# Altium PCB JLC_LED_PCB.PcbDoc (part 1 of 2)
Units mm, origin at the board's own origin, x right, y up, seen from the top; angles counter-clockwise.
Board outline 99.87 x 66.87 mm, 2 copper layers (Top Layer, Bottom Layer); 124 components, 99 nets, 405 pads, 296 vias.
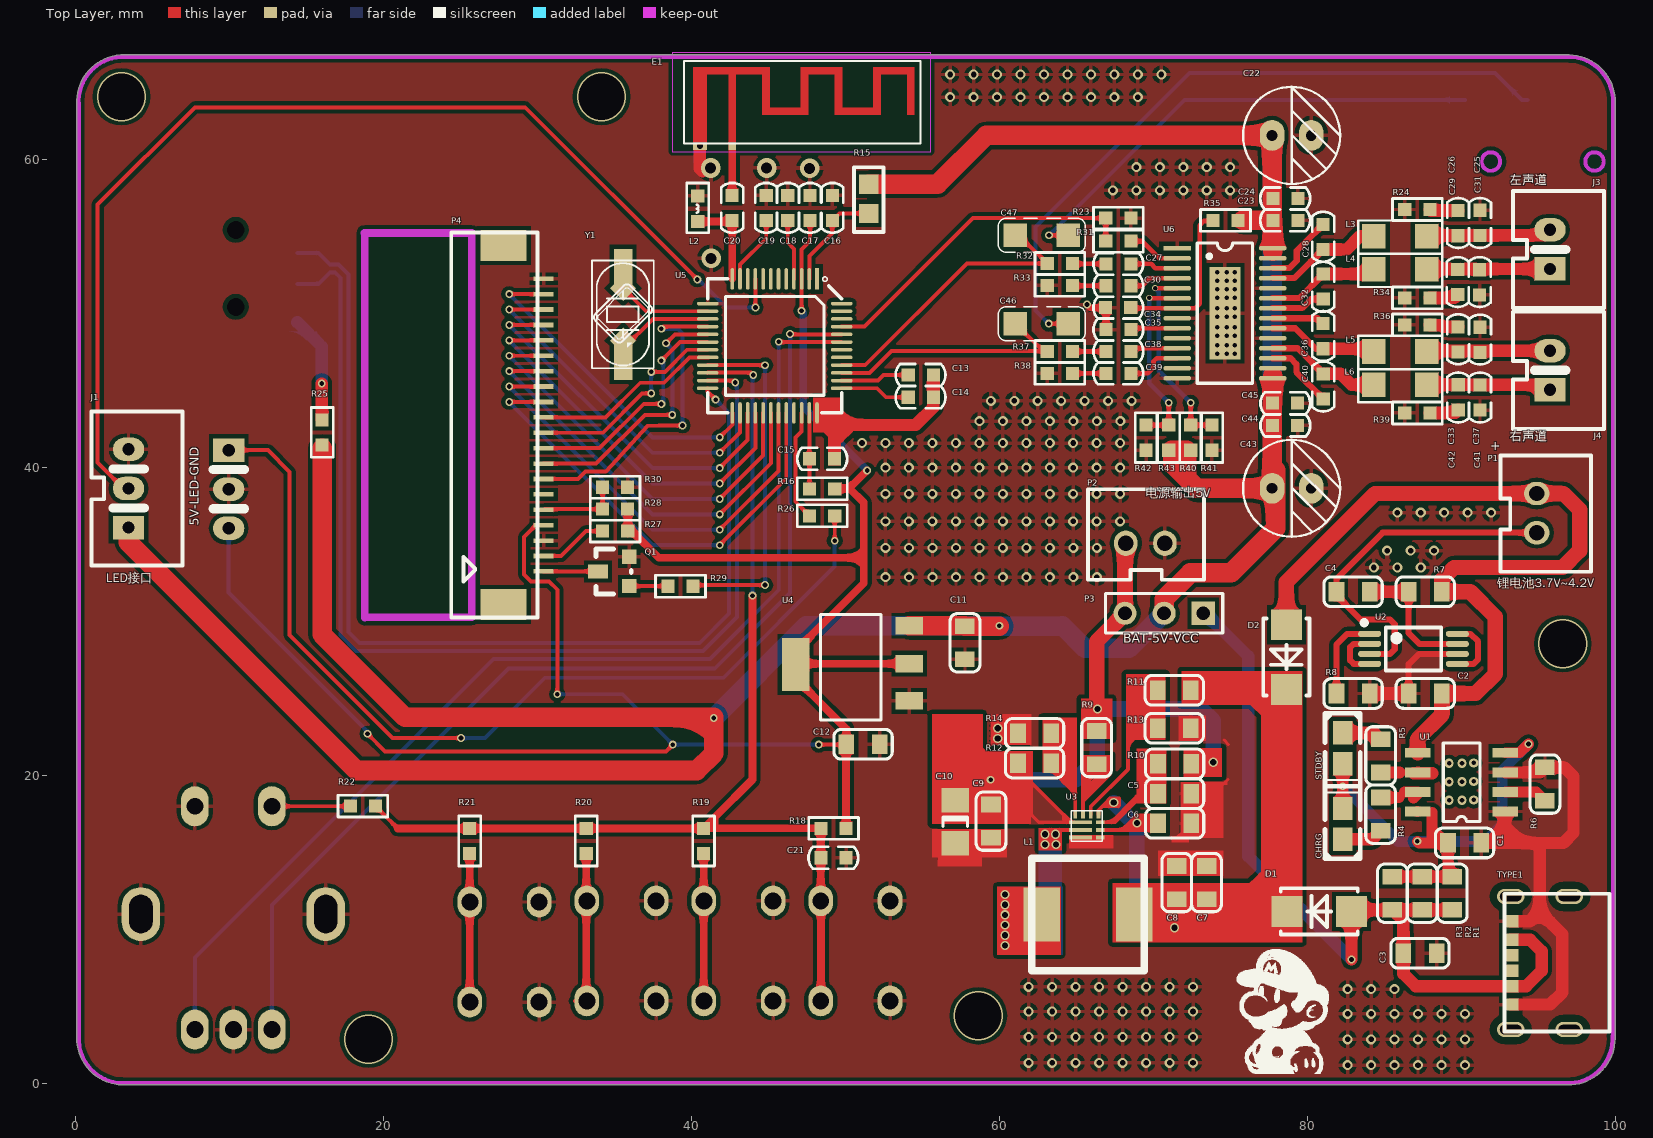
[diagram p0: Top Layer view]
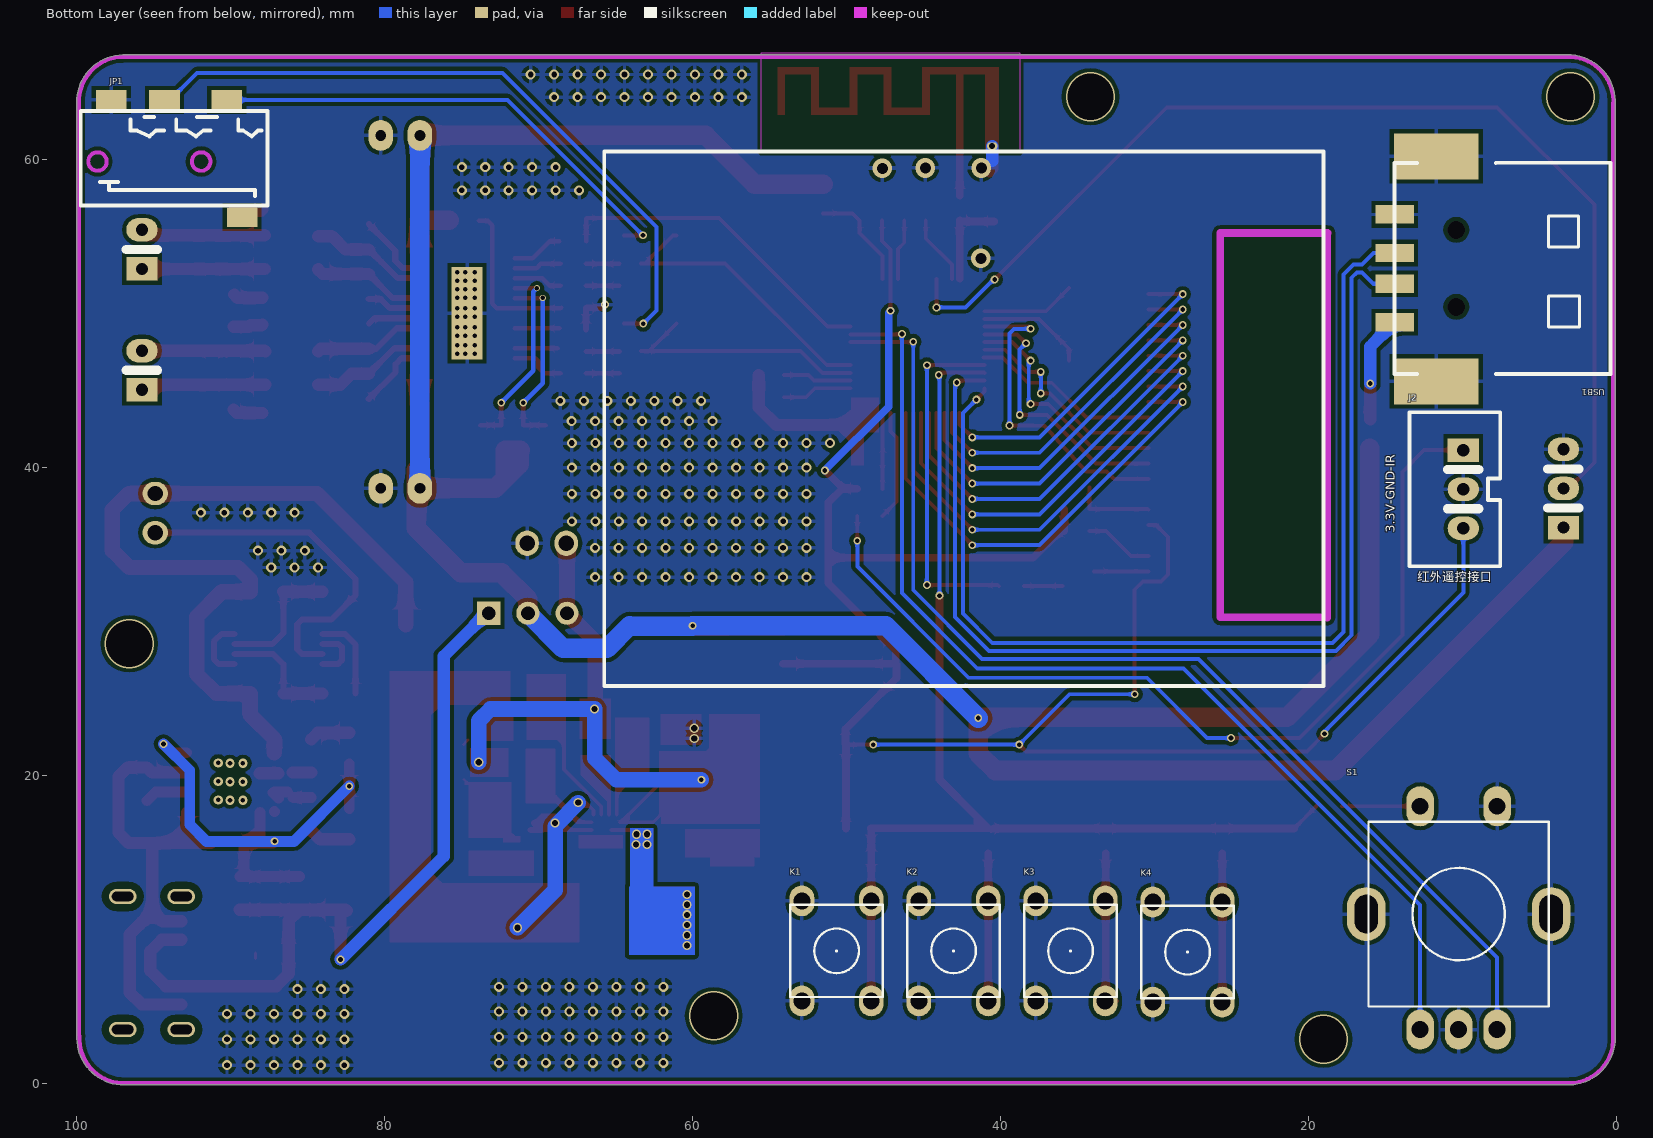
[diagram p1: Bottom Layer view, seen from below]

## Layer stack, top to bottom
Top Solder: solder mask 0.0102, Solder Resist, Dk 3.5
Top Layer: signal copper 0.0356
Dielectric 1: dielectric 0.32, FR-4, Dk 4.8
Bottom Layer: signal copper 0.0356
Bottom Solder: solder mask 0.0102, Solder Resist, Dk 3.5

## Board outline
0.081,2.784 0.081,22.784 cw(c0.208,22.784) 0.081,22.784 0.081,63.598 cw(c3.104,63.779) 2.917,66.802 cw(c3.104,63.779) 2.918,66.802 2.917,66.802 cw(c2.926,66.675) 2.926,66.802 96.698,66.802 cw(c96.698,66.675) 96.718,66.801 cw(c96.737,66.675) 96.729,66.802 cw(c96.915,63.779) 99.938,63.965 cw(c99.811,63.957) 99.938,63.957 99.938,3.143 cw(c96.915,2.962) 99.943,2.962 cw(c96.915,2.962) 97.126,-0.059 cw(c97.104,0.066) 97.104,-0.061 3.286,-0.061 cw(c3.104,2.962) 0.081,2.776 cw(c0.208,2.784)
cut-out: -6.553,-102.159 -6.299,-102.159 -6.299,-101.905 -6.553,-101.905

## Design rules (kind name [scope] priority, off if disabled: settings)
Clearance [All] p1: gap=0.254 ignorepadtopadclearanceinfootprint=TRUE
ComponentClearance [All] p1: gap=0 collisioncheckmode=3 verticalgap=0 showdistances=FALSE
DiffPairsRouting DiffPair_50omuDiffPairsRouting [InDifferentialPair ('USBDX')] p1: maxlimit=0.508 minlimit=0.254 mostfreqgap=0.254 toplayer_minwidth=0.152 toplayer_maxwidth=0.381 toplayer_prefwidth=0.254 bottomlayer_minwidth=0.152 bottomlayer_maxwidth=0.381 bottomlayer_prefwidth=0.254 maxuncoupledlength=12.7
HoleSize [All] p1: absolutevalues=TRUE maxlimit=10 minlimit=0 maxpercent=80.000 minpercent=20.000
HoleToHoleClearance [All] p1: gap=0 allowstackedmicrovias=TRUE
MatchedLengths MatchedLengths_1 [InDifferentialPair ('USBDX')] p1: tolerance=25.4 checknetsindiffpair=FALSE checkdiffpairvsdiffpair=TRUE checkxsignals=TRUE checkothers=TRUE
MatchedLengths DiffPair_50omuMatchedLengths [InDifferentialPair ('USBDX')] p2: tolerance=0.254 checknetsindiffpair=FALSE checkdiffpairvsdiffpair=TRUE checkxsignals=TRUE checkothers=TRUE
MatchedLengths [InDifferentialPair ('USBDX')] p3: tolerance=25.4 checknetsindiffpair=FALSE checkdiffpairvsdiffpair=TRUE checkxsignals=TRUE checkothers=TRUE
MinimumSolderMaskSliver [All] p1: minsoldermaskwidth=0
PolygonConnect [All] p1: connectstyle=Relief reliefconductorwidth=0.254 reliefentries=4 polygonreliefangle="90 Angle" airgapwidth=0.254
RoutingVias [All] p1: holewidth=0.711 width=1.27 viastyle="Through Hole" minholewidth=0.152 minwidth=0.254 maxholewidth=0.711 maxwidth=1.27
SilkToSilkClearance [All] p1: silktosilkclearance=0
SilkToSolderMaskClearance [IsPad] p1: minsilkscreentomaskgap=0 clearancetoexposedcopper=TRUE
SolderMaskExpansion [All] p1: expansion=0.102
Width [All] p1: maxlimit=2.54 minlimit=0.152 preferedwidth=0.254
23 further rules are at their usual default settings.

## Classes and differential pairs
component class LED原理图: C1 C2 C3 C4 C5 C6 C7 C8 C9 C10 C11 C12 CHRG D1 D2 L1 P1 P2 P3 R1 R2 R3 R4 R5 R6 R7 R8 R9 R10 R11 R12 R13 R14 STDBY TYPE1 U1 U2 U3 U4 U?
component class BLE主控原理图: C13 C14 C15 C16 C17 C18 C19 C20 C21 E1 J1 J2 K1 K2 K3 K4 L2 P4 Q1 R15 R16 R18 R19 R20 R21 R22 R25 R26 R27 R28 R29 R30 S1 U5 USB1 Y1
component class 功放原理图: C22 C23 C24 C25 C26 C27 C28 C29 C30 C31 C32 C33 C34 C35 C36 C37 C38 C39 C40 C41 C42 C43 C44 C45 C46 C47 J3 J4 JP1 L3 L4 L5 L6 R23 R24 R31 R32 R33 R34 R35 R36 R37 R38 R39 R40 R41 R42 R43 U6
differential pair USBDX: +USBDX_P -USBDX_N

## Components (designator, comment, footprint, x,y, rotation, side; value= is the part's Value field where it differs from the comment)
C1 "Cap" 0805C 89.091,15.644 r0 top value=106
C2 "Cap" 0805C 88.699,25.347 r180 top value=106
C3 "Cap" 0805C 88.354,8.481 r180 top value=226
C4 "Cap" 0805C 81.852,31.951 r0 top value=106
C5 "Cap" 0805C 72.426,18.848 r180 top value=475
C6 "Cap" 0805C 70.269,16.918 r0 top value=105
C7 "Cap" 0805C 73.419,14.149 r270 top value=226
C8 "Cap" 0805C 71.488,14.149 r270 top value=226
C9 "Cap" 0805C 59.423,18.137 r270 top value=226
C10 "Cap2" C1206#1 57.112,17.019 r270 top value=100uF/10V
C11 "Cap" 0805C 57.734,27.559 r90 top value=105
C12 "Cap" 0805C 52.197,22.048 r180 top value=105
C13 "105" C0603 54.864,46.025 r0 top
C14 "105" C0603 54.864,44.577 r0 top
C15 "105" C0603 48.456,40.589 r180 top
C16 "105" C0603 49.124,56.866 r270 top
C17 "105" C0603 47.676,56.866 r270 top
C18 "105" C0603 46.228,56.866 r270 top
C19 "105" C0603 44.831,56.866 r270 top
C20 "2.7P" C0603 42.621,56.866 r270 top
C21 "NC/100pF" C0603 49.2,14.682 r0 top
C22 "470uF/25V" EC2.5-6.3 78.943,61.57 r0 top
C23 "104" C0603 78.537,56.058 r0 top
C24 "102" C0603 78.537,57.48 r0 top
C25 "102" C0603 91.173,55.902 r90 top
C26 "102" C0603 89.751,55.88 r270 top
C27 "475" C0603 67.704,53.238 r0 top
C28 "224" C0603 80.988,54.991 r270 top
C29 "102" C0603 89.73,52.067 r90 top
C30 "475" C0603 67.704,51.816 r0 top
C31 "102" C0603 91.148,52.045 r270 top
C32 "224" C0603 80.993,51.767 r90 top
C33 "102" C0603 89.756,48.336 r270 top
C34 "106" C0603 67.681,50.394 r180 top
C35 "105" C0603 67.704,48.971 r0 top
C36 "224" C0603 80.988,48.542 r270 top
C37 "102" C0603 91.173,48.311 r270 top
C38 "105" C0603 67.704,47.549 r0 top
C39 "105" C0603 67.704,46.126 r0 top
C40 "224" C0603 80.993,45.286 r90 top
C41 "102" C0603 91.173,44.555 r270 top
C42 "102" C0603 89.761,44.578 r90 top
C43 "470uF/25V" EC2.5-6.3 78.943,38.659 r0 top
C44 "104" C0603 78.522,42.748 r180 top
C45 "102" C0603 78.522,44.196 r180 top
C46 "100uF" C1206#2 64.44,49.357 r180 top
C47 "100uF" C1206#2 64.44,55.093 r180 top
CHRG "RED" LED-0805 82.258,15.879 r90 top
D1 "SS34" LC-SMA(DO-214AC)_S2 80.734,11.199 r0 top
D2 "SS34" LC-SMA(DO-214AC)_S2 78.6,27.713 r90 top
E1 "BT_ANT" 新F天线 42.621,60.884 r0 top
J1 "LED" CON-3X2.54 3.429,38.659 r90 top
J2 "CON3" CON-3X2.54 9.931,38.608 r270 bottom
J3 "LOUT" CON-2X2.54 95.717,52.908 r90 top
J4 "ROUT" CON-2X2.54 95.717,45.06 r90 top
JP1 "4 HEADER" AUX1 89.214,56.27 r270 bottom
K1 "" KEY 50.622,8.636 r270 bottom
K2 "" KEY 43.028,8.636 r270 bottom
K3 "" KEY 35.433,8.636 r270 bottom
K4 "" KEY 27.838,8.558 r270 bottom
L1 "Inductor" 电感SMD 65.72,10.999 r180 top value=1R5
L2 "NC" L0603 40.386,56.818 r270 top
L3 "600R/1MHz" R1206 85.994,55.042 r0 top
L4 "600R/1MHz" R1206 85.994,52.883 r0 top
L5 "600R/1MHz" R1206 85.994,47.549 r0 top
L6 "600R/1MHz" R1206 85.994,45.39 r0 top
P1 "Header 2" XH2.54-2 94.864,38.33 r90 top
P2 "Header 2" XH2.54-2 68.174,35.103 r180 top
P3 "Header 3" HDR1X3 73.203,30.556 r180 top
P4 "串口彩屏" FFC-P20-1MM 29.083,42.774 r90 top
Q1 "S9014" SOT23 34.925,33.325 r90 top
R1 "Res2" 0805R 89.37,11.3 r90 top value=1R
R2 "Res2" 0805R 87.414,11.3 r90 top value=1R
R3 "Res2" 0805R 85.484,11.3 r90 top value=1R
R4 "Res2" 0805R 84.722,16.431 r90 top value=2K
R5 "Res2" 0805R 84.722,22.375 r270 top value=10K
R6 "Res2" 0805R 95.39,20.546 r270 top value=2K
R7 "Res2" 0805R 88.699,31.951 r180 top value=100R
R8 "Res2" 0805R 81.852,25.347 r0 top value=1K
R9 "Res2" 0805R 66.281,20.753 r90 top value=100K
R10 "Res2" 0805R 70.269,20.778 r0 top value=1K
R11 "Res2" 0805R 72.403,25.554 r180 top value=300K
R12 "Res2" 0805R 63.332,20.829 r180 top value=470K
R13 "Res2" 0805R 72.403,23.09 r180 top value=50K
R14 "Res2" 0805R 61.176,22.76 r0 top value="148K4      268K"
R15 "4R7" R0805 51.486,57.455 r270 top
R16 "4R7" R0603 48.463,38.633 r0 top
R18 "22K" R0603 49.2,16.586 r0 top
R19 "3K" R0603 40.767,15.773 r270 top
R20 "6.2K" R0603 33.147,15.773 r270 top
R21 "9.1K" R0603 25.578,15.771 r270 top
R22 "33K" R0603 18.646,18.034 r180 top
R23 "10K" R0603 67.689,56.21 r0 top
R24 "68R" R0603 87.102,56.769 r0 top
R25 "2R7" R0603 16.002,42.291 r90 top
R26 "1K" R0603 48.463,36.881 r0 top
R27 "0R" R0603 35.029,35.89 r180 top
R28 "3K" R0603 35.021,37.313 r0 top
R29 "10K" R0603 39.268,32.309 r180 top
R30 "10K" R0603 35.021,38.735 r0 top
R31 "1K" R0603 67.689,54.712 r0 top
R32 "5.1K" R0603 63.894,53.264 r0 top
R33 "5.1K" R0603 63.894,51.845 r0 top
R34 "68R" R0603 87.102,51.029 r0 top
R35 "10R" R0603 74.653,56.06 r180 top
R36 "68R" R0603 87.102,49.276 r0 top
R37 "5.1K" R0603 63.894,47.549 r0 top
R38 "5.1K" R0603 63.894,46.126 r0 top
R39 "68R" R0603 87.102,43.561 r0 top
R40 "0R/NC" R0603 72.39,41.953 r90 top
R41 "0R" R0603 73.762,41.953 r90 top
R42 "0R/NC" R0603 69.494,41.953 r90 top
R43 "0R" R0603 70.968,41.953 r90 top
S1 "编码器" BMQ+PUSH 10.236,11.024 r180 bottom
STDBY "GREEN" LED-0805 82.258,22.787 r270 top
TYPE1 "TYPE-CF-6P-RAT-L6.8W" TYPE-CF-6P-RAT-L6.8W 96.139,7.849 r90 top
U1 "TC4056A" SOP-8 92.824,17.682 r180 top
U2 "DW03D" LC-TSSOP-8_3x4.4x065P 86.855,28.242 r270 top
U3 "SY7065" QFN2*2-10 65.646,16.74 r0 top
U4 "AMS1117-3.3" SOT-233 54.111,24.868 r180 top
U5 "AC6951C" LQFP48 45.39,47.904 r270 top locked
U6 "HT328" SOP28 74.613,50.038 r0 top
USB1 "USB" USBSMT 10.389,50.444 r90 bottom
Y1 "HS-24M" JZ 35.535,49.962 r0 top locked

## Footprints (in the part's own frame and the unit in brackets; to place one, negate y for a bottom-side part, rotate by r counter-clockwise, add the part's x,y. Pads: shape width x height; smd on the part's side, far side on the other; paste and mask are expansions set on the pad)
0805C [mil]
  rect 40x50 smd: 1(0,0) 2(85,0)
  silkscreen extent -32,-38 117,38, body extent 3,-25 82,25, height 30
0805R [mil]
  rect 40x50 smd: 1(0,0) 2(85,0)
  silkscreen extent -32,-38 117,38, body extent 3,-25 82,25, height 30
AUX1 [mm]
  rect 1.27x2 smd: 1(-7.611,-8.5) 2(-7.611,-5.05) 3(-7.611,-1) 4(0,0)
  Keep-Out Layer circle w0.254: c-3.612,-9.394 r0.6
  Keep-Out Layer circle w0.254: c-3.612,-2.663 r0.6
  silkscreen extent -6.9,-10.48 -0.75,1.65
BMQ+PUSH [mm]
  oval 1.8x2.6 hole 1.1: 1(-2.5,-7.5) 2(0,-7.5) 3(2.5,-7.5) 4(-2.5,7) 5(2.5,7)
  oval 2.5x3.5 hole 1.5 slot 2.5 at 90 deg: 6(-6,0) 7(6,0)
  silkscreen extent -5.85,-6 5.85,6
C0603 [mm]
  rect 0.85x0.85 smd: 1(-0.815,0) 2(0.815,0)
  silkscreen extent -1.63,-0.71 1.61,0.71
C1206#1 [mm] "Chip Capacitor; Body 3.2 x 1.6 mm (LxW typ)"
  rect 1.6x1.8 smd: 1(-1.4,0) 2(1.4,0)
  silkscreen extent -0.3,-0.8 0.3,0.8
C1206#2 [mm]
  rect 1.524x1.524 smd: 1(0,0) 2(3.429,0)
  silkscreen extent -1.11,-1.1 4.54,1.1
CON-2X2.54 [mil]
  rect 60x80 hole 31.5: 1(0,0)
  oval 60x80 hole 31.5: 2(100,0)
  silkscreen extent -100,-138 200,94
CON-3X2.54 [mil]
  rect 60x80 hole 31.5: 1(-100,0)
  oval 60x80 hole 31.5: 2(0,0) 3(100,0)
  silkscreen extent -197,-138 197,94
EC2.5-6.3 [mm]
  oval 1.6x2 hole 0.7: 1(-1.27,0.01) 2(1.27,0.01)
  silkscreen extent -3.15,-3.14 3.15,3.16
FFC-P20-1MM [mm]
  rect 0.3x1.3 smd: 1(-9.5,-1.3) 2(-8.5,-1.3) 3(-7.5,-1.3) 4(-6.5,-1.3) 5(-5.5,-1.3) 6(-4.5,-1.3) 7(-3.5,-1.3) 8(-2.5,-1.3) 9(-1.5,-1.3) 10(-0.5,-1.3) 11(0.5,-1.3) 12(1.5,-1.3) 13(2.5,-1.3) 14(3.5,-1.3) 15(4.5,-1.3) 16(5.5,-1.3) 17(6.5,-1.3) 18(7.5,-1.3) 19(8.5,-1.3) 20(9.5,-1.3)
  rect 2x3 smd: 21(11.651,1.3) 22(-11.651,1.3)
  silkscreen extent -12.5,-0.9 12.5,4.7
HDR1X3 [mm] "Connector; Header; 3 Position"
  rect 1.5x1.5 hole 0.9: 1(0,0)
  round 1.5 hole 0.9: 2(2.54,0) 3(5.08,0)
  silkscreen extent -1.27,-1.27 6.35,1.27
JZ [mm]
  rect 1.2x2.5 smd: 1(0,-3) 2(0,3)
  rect 1.2x1.2 smd rot 45: 1(0,-1.7) 2(0,1.7)
  rect 1.2x1.2 on Top Overlay rot 45: 3(1.7,0) 4(-1.7,0)
  silkscreen extent -2.01,-3.5 1.99,3.5
KEY [mm]
  oval 2x1.6 hole 1.1: 1(-3.25,2.25) 1(3.25,2.25) 2(-3.25,-2.25) 2(3.25,-2.25)
  silkscreen extent -3,-3 3,3
L0603 [mm]
  rect 0.85x0.85 smd: 1(-0.83,0) 2(0.83,0)
  silkscreen extent -1.68,-0.71 1.56,0.71
LC-SMA(DO-214AC)_S2 [mm]
  rect 2x2 smd: 1(2.1,0) 2(-2.1,0)
  silkscreen extent -2.5,-1.5 2.5,1.5
LC-TSSOP-8_3x4.4x065P [mm]
  oval 0.4x1.5 smd mask+0.051: 1(-0.975,-2.85) 2(-0.325,-2.85) 3(0.325,-2.85) 4(0.975,-2.85) 5(0.975,2.85) 6(0.325,2.85) 7(-0.325,2.85) 8(-0.975,2.85)
  silkscreen extent -1.85,-3.35 1.4,1.8
LED-0805 [mil]
  rect 60x50 smd: 1(0,0) 2(78.74,0)
  silkscreen extent -50,-45 136,45
LQFP48 [mm]
  rect 1.4x0.23 smd: 1(-4.357,2.739)
  oval 1.4x0.23 smd: 2(-4.357,2.239) 3(-4.357,1.739) 4(-4.357,1.239) 5(-4.357,0.739) 6(-4.357,0.239) 7(-4.357,-0.261) 8(-4.357,-0.761) 9(-4.357,-1.261) 10(-4.357,-1.761) 11(-4.357,-2.261) 12(-4.357,-2.761) 25(4.343,-2.761) 26(4.343,-2.261) 27(4.343,-1.761) 28(4.343,-1.261) 29(4.343,-0.761) 30(4.343,-0.261) 31(4.343,0.239) 32(4.343,0.739) 33(4.343,1.239) 34(4.343,1.739) 35(4.343,2.239) 36(4.343,2.739)
  oval 0.23x1.4 smd: 13(-2.757,-4.361) 14(-2.257,-4.361) 15(-1.757,-4.361) 16(-1.257,-4.361) 17(-0.757,-4.361) 18(-0.257,-4.361) 19(0.243,-4.361) 20(0.743,-4.361) 21(1.243,-4.361) 22(1.743,-4.361) 23(2.243,-4.361) 24(2.743,-4.361) 37(2.743,4.339) 38(2.243,4.339) 39(1.743,4.339) 40(1.243,4.339) 41(0.743,4.339) 42(0.243,4.339) 43(-0.257,4.339) 44(-0.757,4.339) 45(-1.257,4.339) 46(-1.757,4.339) 47(-2.257,4.339) 48(-2.757,4.339)
  silkscreen extent -4.49,-4.36 4.34,4.34
QFN2*2-10 [mm]
  rect 1.5x0.25 smd: 1(-0.4,0.25) 2(-0.4,-0.25) 3(-0.4,-0.75)
  rect 0.55x0.25 smd mask+0.102: 4(0.875,-0.75)
  rect 0.55x0.25 smd: 5(0.875,-0.25) 6(0.875,0.25)
  rect 0.25x0.5 smd: 7(0.75,0.75) 8(0.25,0.75) 9(-0.25,0.75) 10(-0.75,0.75)
  silkscreen extent -1,-1 1,1, body extent -1.47,-1 1.01,1.01, height 63.5
R0603 [mm]
  rect 0.85x0.85 smd: 1(-0.815,0) 2(0.815,0)
  silkscreen extent -1.62,-0.71 1.62,0.71
R0805 [mm]
  rect 1.25x1.25 smd: 1(-0.96,0.007) 2(0.94,0.007)
  silkscreen extent -2.06,-0.95 2.16,0.96
R1206 [mm]
  rect 1.52x1.6 smd: 1(-1.71,0) 2(1.71,0)
  silkscreen extent -2.73,-1.14 2.74,1.02
SOP28 [mm]
  rect 1.8x0.3 smd: 1(-3.1,4.225)
  oval 1.8x0.3 smd: 2(-3.1,3.575) 3(-3.1,2.925) 4(-3.1,2.275) 5(-3.1,1.625) 6(-3.1,0.975) 7(-3.1,0.325) 8(-3.1,-0.325) 9(-3.1,-0.975) 10(-3.1,-1.625) 11(-3.1,-2.275) 12(-3.1,-2.925) 13(-3.1,-3.575) 14(-3.1,-4.225) 15(3.1,-4.225) 16(3.1,-3.575) 17(3.1,-2.925) 18(3.1,-2.275) 19(3.1,-1.625) 20(3.1,-0.975) 21(3.1,-0.325) 22(3.1,0.325) 23(3.1,0.975) 24(3.1,1.625) 25(3.1,2.275) 26(3.1,2.925) 27(3.1,3.575) 28(3.1,4.225)
  rect 2x6 all layers, no hole: 29(0,0)
  silkscreen extent -1.8,-4.55 1.8,4.56
SOP-8 [mil]
  rect 65x25 smd: 1(0,0) 2(0,-50) 3(0,-100) 4(0,-150) 5(224.41,-150) 6(224.41,-100) 7(224.41,-50) 8(224.41,0)
  silkscreen extent 65,-175 159,25
SOT23 [mil]
  rect 36x36 smd: 1(-39.7,-40) 2(35.3,-40)
  rect 36x50 smd: 3(-2.2,40)
  silkscreen extent -60,-45 55,45
SOT-233 [mil]
  rect 70x45 smd: 1(0,0) 2(0,-95.04) 3(0,-192)
  rect 70x135 smd: 4(290.35,-92.95)
  silkscreen extent 72,-221 227,49
TYPE-CF-6P-RAT-L6.8W [mm]
  oval 1x1.8 hole 1.4 slot 0.6 at 0 deg unplated: 0(-4.32,-0.829) 0(-4.32,2.971) 0(4.32,-0.829) 0(4.32,2.971)
  rect 0.8x1 smd: 1(-2.7,2.971) 2(-1.5,2.971) 3(-0.5,2.971) 4(0.5,2.971) 5(1.5,2.971) 6(2.7,2.971)
  silkscreen extent -4.44,-3.43 4.49,3.37, body extent -4.44,-3.98 4.5,3.92, height 1.61
USBSMT [mm]
  rect 1.2x2.5 smd: 1(-1,4) 2(1.5,4) 3(3.5,4) 4(6,4)
  rect 3x5.5 smd: 5(-4.837,1.3) 6(9.773,1.3)
  round 0 hole 1.15: 7(5,0) 8(0,0)
  silkscreen extent -4.36,-10 9.36,4
XH2.54-2 [mil]
  oval 60x65 hole 39.37: 1(0,0) 2(-100.1,0)
  silkscreen extent -200,-138 97,93, body extent -198,-142 98,94, height 276
新F天线 [mm]
  rect 0.5x0.5 smd mask+0.003: 1(0,0)
  rect 0.5x0.5 on Top Solder mask+0.003: 1(0,0)
  rect 0.9x0.5 smd mask+0.003: 2(-2.1,0)
  oval 0.7x0.5 hole 0.4 mask+0.01: 2(-2.1,0)
  rect 0.9x0.5 on Top Solder: 2(-2.1,0)
  Top Layer region: 9.151,4.65 11.851,4.65 11.851,5.15 9.151,5.15
  Top Layer region: 6.651,2.01 9.651,2.01 9.651,2.51 6.651,2.51
  Top Layer region: 4.451,4.65 7.151,4.65 7.151,5.15 4.451,5.15
  Top Layer region: 4.451,2.01 4.951,2.01 4.951,5.15 4.451,5.15
  Top Layer region: 1.951,2.01 2.451,2.01 2.451,5.15 1.951,5.15
  Top Layer region: -0.247,-0.25 0.253,-0.25 0.253,5.15 -0.247,5.15
  Top Layer region: -2.549,-0.25 -1.65,-0.25 -1.65,5.15 -2.549,5.15
  Top Layer region: -2.549,4.65 2.451,4.65 2.451,5.15 -2.549,5.15
  Top Layer region: 1.951,2.01 4.951,2.01 4.951,2.51 1.951,2.51
  Top Layer region: 6.651,2.01 7.151,2.01 7.151,5.15 6.651,5.15
  Top Layer region: 9.151,2.01 9.651,2.01 9.651,5.15 9.151,5.15
  Top Layer region: 11.351,2.01 11.851,2.01 11.851,5.15 11.351,5.15
  silkscreen extent -3.13,0.18 12.22,5.53
电感SMD [mm]
  rect 2.35x3.5 smd: 1(-3,0) 2(3,0)
  silkscreen extent -3.65,-3.65 3.65,3.65

## Part data
C1 C2 C3 C4 C5 C6 C7 C8 C9 C10 C11 C12: "Capacitor", Publisher="Altium Limited"
  C1 C2 C3 C4 C5 C6 C7 C8 C9 C11 C12: LatestRevisionDate=17-Jul-2002, LatestRevisionNote="Re-released for DXP Platform.", PackageDescription="Radial Cap, Thru-Hole; 2 Leads; 0.3 in Pin Spacing", PackageReference=RAD-0.3, Published=8-Jun-2000
  C10: PackageDescription="Capacitor; 2 Leads", PackageReference=CAPR5-4X5, Published=23-Sep-2002
C13 C14 C15 C16 C17 C18 C19 C20 C21 C23 C24 C25 C26 C27 C28 C29 C30 C31 C32 C33 C34 C35 C36 C37 C38 C39 C40 C41 C42 C44 C45 C46 C47: library part CAP-0603
C22 C43: library part +CAP
CHRG STDBY: library part LED0, "Typical INFRARED GaAs LED", LatestRevisionDate=08-Jul-2005, LatestRevisionNote="Mech Layer 1 removed.", PackageDescription="LED; 2 Leads", PackageReference=LED-0, Published=8-Jun-2000, Publisher="Altium Limited"
D1 D2: library part Diode, "Default Diode", Code_JEDEC=DO-214-AB, LatestRevisionDate=17-Jul-2002, LatestRevisionNote="Re-released for DXP Platform.", PackageDescription="DO-214-AB/SMC; 2 C-Bend Leads; Body 7.9 x 5.9 mm, inc. leads (LxW)", PackageReference=SMC, PackageVersion=Sep-1996, Published=8-Jun-2000, Publisher="Altium Limited"
J1: library part CON3, "Connector"
J2: "Connector"
J3 J4: library part CON2, "Connector"
JP1: "4 Pin Header"
K1 K2 K3 K4: library part Key
L2: library part L
L3 L4 L5 L6 R15 R18 R19 R20 R21 R22 R23 R24 R26 R27 R28 R29 R30 R31 R32 R33 R34 R35 R36 R37 R38 R39 R40 R41 R42 R43: library part RES-0603
P1 P2: "Header, 2-Pin", LatestRevisionDate=17-Jul-2002, LatestRevisionNote="Re-released for DXP Platform.", Publisher="Altium Limited"
P3: "Header, 3-Pin", LatestRevisionDate=17-Jul-2002, LatestRevisionNote="Re-released for DXP Platform.", Publisher="Altium Limited"
P4: library part LCD-20P
Q1: library part NPN
R1 R2 R3 R4 R5 R6 R7 R8 R9 R10 R11 R12 R13 R14: "Resistor", LatestRevisionDate=17-Jul-2002, LatestRevisionNote="Re-released for DXP Platform.", PackageDescription="Axial Device, Thru-Hole; 2 Leads; 0.4 in Pin Spacing", PackageReference=AXIAL-0.4, Published=8-Jun-2000, Publisher="Altium Limited"
R16 R25: library part RES
S1: library part CON7, "Connector"
U6: library part HT368
Y1: library part CRYSTAL
L1: Code_IEC=1005, Code_JEITA=0402, LatestRevisionDate=29-May-2009, LatestRevisionNote="IPC-7351 Footprint Added.", PackageDescription="Chip Inductor", PackageReference=0402-A, Published=8-Jun-2000, Publisher="Altium Limited"

## Free pads (board coordinates)
  rect 2.35x4 on Top Solder: 0(89.98,19.587)
  rect 2.35x4 on Bottom Solder: 1(89.903,19.562)

## Via types
v1: diameter 0.65, hole 0.365, Top Layer to Bottom Layer, tented both sides, 174 vias
v2: diameter 0.508, hole 0.305, Top Layer to Bottom Layer, 51 vias
v3: diameter 0.6, hole 0.3, Top Layer to Bottom Layer, 38 vias
v4: diameter 0.6, hole 0.4, Top Layer to Bottom Layer, 17 vias
v5: diameter 3.2, hole 3, Top Layer to Bottom Layer, 5 vias
v6: diameter 1.27, hole 0.711, Top Layer to Bottom Layer, 4 vias
v7: diameter 0.5, hole 0.3, Top Layer to Bottom Layer, 4 vias
v8: diameter 0.4, hole 0.305, Top Layer to Bottom Layer, 1 vias
v9: diameter 0.4, hole 0.3, Top Layer to Bottom Layer, 1 vias
v10: diameter 0.6/0.6 (per signal layer), hole 0.3, Top Layer to Bottom Layer, 1 vias

## Nets (pads, with @x,y where several pads share a name; then routed paths per layer and width w, separated by ;. In a path a pad name is that pad's centre, name@x,y a point inside that pad or via, vN(x,y) a via of type N, cw(c..) or ccw(c..) an arc to the next point about the centre after c; other vN are vias at no path point)
5V: C11.2 C22.1 C23.1 C24.1 C43.1 C44.2 C45.2 J1.1 P3.2 R15.1 R25.1 R35.1 R40.1 R43.1 U4.3 U6.15 U6.16 U6.27 U6.28 | length 219.6
  Top Layer w1.27: J1.1@3.429,36.119 3.429,35.154 18.237,20.345 40.31,20.345 41.427,21.463 41.427,22.787 ; R25.1@16.002,41.274 16.002,29.185 21.387,23.8 40.335,23.8 ; R15.1@51.493,58.415 55.951,58.415 59.116,61.58 C22.1@77.673,61.58 77.673,56.106 C23.1@77.722,56.058 ; U4.3@54.111,29.745 57.708,29.745 C11.2@57.734,29.718 v2@59.969,29.718 ; P3.2@70.663,30.556 70.663,31.471 72.365,33.172 75.006,33.172 77.902,36.068 77.902,39.837 ; R43.1@71.171,41.138 R40.1@72.136,41.138 ; R43.1@71.242,40.864 71.242,40.213 72.136,39.319 ; R40.1@72.136,40.91 72.136,39.319 ; R35.1@75.768,56.06 75.771,56.058 C23.1@77.722,56.058 ; U6.15@77.707,45.957 C45.2@77.707,44.196 77.673,44.163 C43.1@77.673,38.669 72.786,38.669 72.136,39.319 ; 77.713,54.06 77.722,54.07 C23.1@77.722,56.058 ; 40.335,23.8 41.427,23.8 v2(41.427,23.749) 41.427,22.787 ; 40.335,23.8 41.348,22.787 41.427,22.787
  Bottom Layer w1.27: v2(41.427,23.749) 47.422,29.743 v2(59.969,29.743) v2@59.995,29.743 ; v2@59.995,29.718 64.031,29.718 64.058,29.745 65.532,28.27 68.377,28.27 P3.2@70.663,30.556 ; C43.1@77.673,38.669 C22.1@77.673,61.58
+3.3V: C12.2 C17.2 J2.3 P4.4 R16.2 R18.2 R27.1 R28.2 U4.2 U4.4 U5.3 | length 143.6
  Top Layer w0.254: v2(18.948,22.733) 20.091,21.59 38.329,21.59 v2(38.764,22.025) ; P4.4@30.383,36.274 29.873,36.274 29.108,35.509 29.108,33.071 29.566,32.614 30.734,32.614 31.267,32.08 v2(31.267,25.298) ; v2(47.117,50.19) 47.129,50.202 U5.3@47.129,52.262 47.129,54.164 47.676,54.712 C17.2@47.676,56.051 ; v2(48.238,22.025) C12.2@50.015,22.025
  Top Layer w0.5: R28.2@35.836,37.313 35.844,37.305 R27.1@35.844,35.89 36.119,35.89 37.846,34.163 50.698,34.163 ; R16.2@49.278,38.633 50.19,38.633 ; R18.2@50.015,16.586 50.015,22.025 C12.2@50.038,22.048 50.038,23.038 46.736,26.34 U4.4@46.736,27.229 U4.4@46.789,27.282 ; 51.156,34.62 50.698,34.163 ; v2(51.384,39.827) 50.19,38.633 ; U4.2@54.111,27.282 U4.4@46.789,27.282 ; U4.4@46.789,27.282 46.789,28.145 51.156,32.512 51.156,33.706 ; 50.19,38.633 50.267,38.633 51.156,37.744 51.156,34.188 ; 50.698,34.163 51.13,34.163 51.156,34.188 ; 50.698,34.163 51.156,33.706 ; 51.156,33.706 51.156,34.188
  Bottom Layer w0.254: J2.3@9.931,36.068 9.931,31.902 18.948,22.885 v2(18.948,22.733) ; v2(31.267,25.298) 35.491,25.298 v2(38.764,22.025) v2(48.238,22.025)
  Bottom Layer w0.5: v2(47.117,50.19) 47.244,50.063 47.244,43.967 v2(51.384,39.827)
/CS: P4.7 U5.16 | length 21.2
  Top Layer w0.254: P4.7@30.383,39.274 32.619,39.274 33.096,39.751 34.414,39.751 37.11,42.705 37.978,42.745 ; 37.873,42.74 39.387,42.74 v2(39.395,42.748) ; v2(38.024,49.022) 38.164,49.162 U5.16@41.029,49.162
  Bottom Layer w0.254: v2(38.024,49.022) 39.091,49.022 39.395,48.717 v2(39.395,42.748)
/RSTB: P4.8 U5.17 | length 17.4
  Top Layer w0.254: P4.8@30.383,40.274 33.792,40.274 36.953,43.435 v2(38.735,43.435) ; v2(38.329,48.082) 38.908,48.662 U5.17@41.029,48.662
  Bottom Layer w0.254: v2(38.329,48.082) 38.735,47.676 v2(38.735,43.435)
AD_KEY: C21.1 K1.1 R18.1 R19.1 R20.1 R21.1 R22.1 U5.22 | length 114.3
  Top Layer w0.254: R22.1@19.461,18.034 20.906,16.588 R20.1@33.147,16.588 R19.1@40.411,16.588 ; R19.1@40.767,16.588 R19.1@40.765,16.586 ; U5.22@41.029,46.162 41.044,46.177 43.84,46.177 v2(43.993,46.025) ; K1.1@48.372,5.386 48.372,12.204 K1.1@48.385,12.217 ; K1.1@48.372,11.886 48.385,11.899 K1.1@48.385,12.217 ; R18.1@48.385,16.612 R18.1@48.385,16.586 ; R19.1@40.765,16.586 R18.1@48.385,16.586 ; R19.1@40.765,16.586 40.589,16.411 40.414,16.586 R19.1@40.765,16.586 ; K1.1@48.385,12.217 C21.1@48.385,14.682 R18.1@48.385,16.586
  Top Layer w0.5: 20.906,16.588 20.909,16.586 R21.1@25.578,16.586 R19.1@40.414,16.586 ; v2(43.942,31.699) 43.942,19.763 41.497,17.318 ; K1.1@48.372,5.386 48.385,5.399 K1.1@48.385,11.899 ; K1.1@48.372,12.204 48.372,16.573 R18.1@48.385,16.586 48.383,16.588 41.58,16.588 ; 41.497,17.318 R19.1@40.767,16.588 41.58,16.588 ; 41.497,17.318 41.497,16.672 41.58,16.588
  Bottom Layer w0.254: v2(43.942,31.699) 43.942,45.999 v2@44.018,46.076 ; v2(43.993,46.025) v2@43.993,46.05
AGND: C13.2 C14.2 C15.1 U5.36 | length 11.6
  Top Layer w0.254: 48.539,42.545 48.539,42.494 48.895,42.139 ; 49.271,42.794 49.301,42.824
  Top Layer w0.8: 49.098,42.672 49.2,42.774 50.165,42.774 ; 49.53,41.986 50.165,42.621 ; 49.53,43.409 50.165,42.774 ; C13.2@55.679,46.025 C14.2@55.679,44.577 55.679,43.919 54.534,42.774 50.165,42.774
AVDD: C34.1 R35.2 U6.7 | length 10.7
  Top Layer w0.3: C34.1@68.496,50.394 68.527,50.363 U6.7@71.513,50.363 72.69,50.363 72.974,50.648 72.974,55.753 73.254,56.032 R35.2@73.838,56.032
BAT+: C2.1 D2.1 P1.1 R7.1 U1.5 | length 54.1
  Top Layer w1: D2.1@78.6,29.813 78.6,32.576 84.355,38.33 P1.1@94.864,38.33 96.594,38.33 97.638,37.286 97.638,34.619 96.545,33.527 89.484,33.527 88.699,32.742 R7.1@88.699,31.951 90.538,31.951 92.164,30.325 92.164,26.617 90.894,25.347 C2.1@88.699,25.347 88.699,23.965 87.124,22.39 U1.5@87.124,21.492
BL_A: P4.2 R27.2 | length 4.5
  Top Layer w0.254: P4.2@30.383,34.274 31.505,34.274 33.122,35.89 R27.2@34.214,35.89
BL_K: P4.1 Q1.3 | length 3.5
  Top Layer w0.254: P4.1@30.383,33.274 Q1.3@33.904,33.274
BL_LIGHT: R29.1 U5.21 | length 22.7
  Top Layer w0.254: R29.1@40.083,32.309 40.16,32.385 v2(44.755,32.385) ; U5.21@41.029,46.662 v2(44.757,46.662)
  Bottom Layer w0.254: v2(44.755,32.385) 44.755,32.61 44.757,32.612 v2(44.757,46.662)
BT_ANT: C20.1 E1.1@42.621,60.884 | length 3.2
  Top Layer w0.254: E1.1@42.621,60.858 E1.1@42.647,60.884
  Top Layer w0.5: C20.1@42.621,57.681 E1.1@42.621,60.858
BT_RF: C20.2 L2.2 U5.12 | length 6.1
  Top Layer w0.254: C20.2@42.558,55.988 C20.2@42.621,56.051 ; U5.12@42.621,52.269 U5.12@42.629,52.262
  Top Layer w0.5: L2.2@40.386,55.988 C20.2@42.558,55.988 ; U5.12@42.621,52.269 C20.2@42.621,56.051
BTAVDD: C19.2 U5.11 | length 4.5
  Top Layer w0.254: U5.11@43.129,52.262 43.129,53.187 44.831,54.889 C19.2@44.831,56.051
DACL: C46.2 R37.1 U5.39 | length 17
  Top Layer w0.254: U5.39@49.729,46.162 51.547,46.162 52.959,47.574 R37.1@62.793,47.574 ; C46.2@61.011,49.357 R37.1@62.793,47.574 ; R37.1@63.079,47.549 62.819,47.549 R37.1@62.793,47.574 ; R37.1@63.307,47.574 R37.1@62.793,47.574
DACR: C47.2 R32.1 U5.40 | length 19.1
  Top Layer w0.254: U5.40@49.729,46.662 51.259,46.662 57.861,53.264 R32.1@63.079,53.264 ; C47.2@61.011,55.093 61.25,55.093 R32.1@63.079,53.264 ; R32.1@63.307,53.264 R32.1@63.079,53.264
DACVDD: C13.1 U5.38 | length 4.5
  Top Layer w0.254: U5.38@49.729,45.662 52.088,45.662 52.451,46.025 C13.1@54.049,46.025
DB0: P4.19 U5.25 | length 21.7
  Top Layer w0.254: v2(28.143,51.274) P4.19@30.383,51.274 ; v2(41.808,41.976) 42.629,42.796 U5.25@42.629,43.562
  Bottom Layer w0.254: v2(28.143,51.274) 37.441,41.976 v2(41.808,41.976)
DB1: P4.18 U5.26 | length 22.9
  Top Layer w0.254: v2(28.143,50.274) P4.18@30.383,50.274 ; v2(41.808,40.976) 43.129,42.296 U5.26@43.129,43.562
  Bottom Layer w0.254: v2(28.143,50.274) 37.441,40.976 v2(41.808,40.976)
DB2: P4.17 U5.27 | length 24.1
  Top Layer w0.254: v2(28.143,49.274) P4.17@30.383,49.274 ; v2(41.808,39.976) 43.629,41.796 U5.27@43.629,43.562
  Bottom Layer w0.254: v2(28.143,49.274) 37.441,39.976 v2(41.808,39.976)
DB3: P4.16 U5.28 | length 25.3
  Top Layer w0.254: v2(28.143,48.274) P4.16@30.383,48.274 ; v2(41.808,38.976) 44.129,41.296 U5.28@44.129,43.562
  Bottom Layer w0.254: v2(28.143,48.274) 37.441,38.976 v2(41.808,38.976)
DB4: P4.15 U5.29 | length 26.5
  Top Layer w0.254: v2(28.143,47.274) P4.15@30.383,47.274 ; v2(41.808,37.976) 44.629,40.796 U5.29@44.629,43.562
  Bottom Layer w0.254: v2(28.143,47.274) 37.441,37.976 v2(41.808,37.976)
DB5: P4.14 U5.30 | length 27.7
  Top Layer w0.254: v2(28.143,46.274) P4.14@30.383,46.274 ; v2(41.808,36.976) 45.129,40.296 U5.30@45.129,43.562
  Bottom Layer w0.254: v2(28.143,46.274) 37.441,36.976 v2(41.808,36.976)
DB6: P4.13 U5.31 | length 28.9
  Top Layer w0.254: v2(28.143,45.274) P4.13@30.383,45.274 ; v2(41.808,35.976) 45.629,39.796 U5.31@45.629,43.562
  Bottom Layer w0.254: v2(28.143,45.274) 37.441,35.976 v2(41.808,35.976)
DB7: P4.12 U5.32 | length 30.1
  Top Layer w0.254: v2(28.143,44.274) P4.12@30.383,44.274 ; v2(41.808,34.976) 46.129,39.296 U5.32@46.129,43.562
  Bottom Layer w0.254: v2(28.143,44.274) 37.441,34.976 v2(41.808,34.976)
GAIN: R40.2 R41.2 U6.5 | length 12.7
  Top Layer w0.3: v8(70.079,51.664) U6.5@71.513,51.663 ; v2(72.39,44.221) R40.2@72.39,42.768 R41.2@73.762,42.768
  Bottom Layer w0.3: v8(70.079,51.664) 70.307,51.435 70.307,46.304 v2(72.39,44.221)